# EAGLE board PCB_sterownik_pasek_LED (EAGLE 6.6.0)
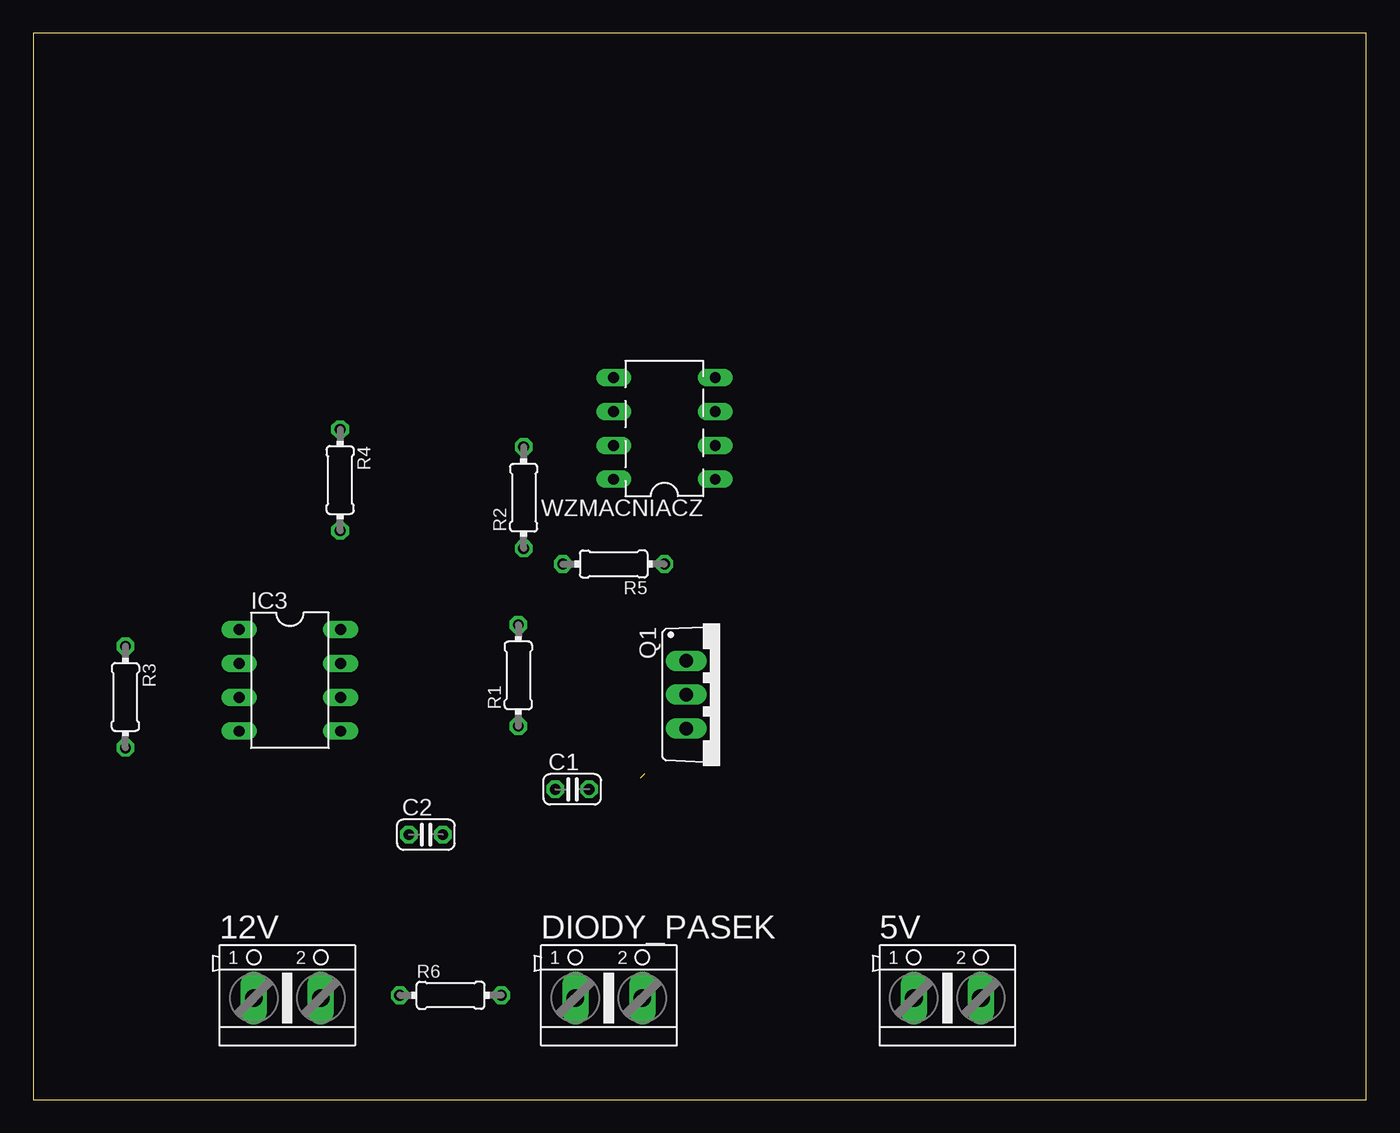
[diagram p0: board, top side]
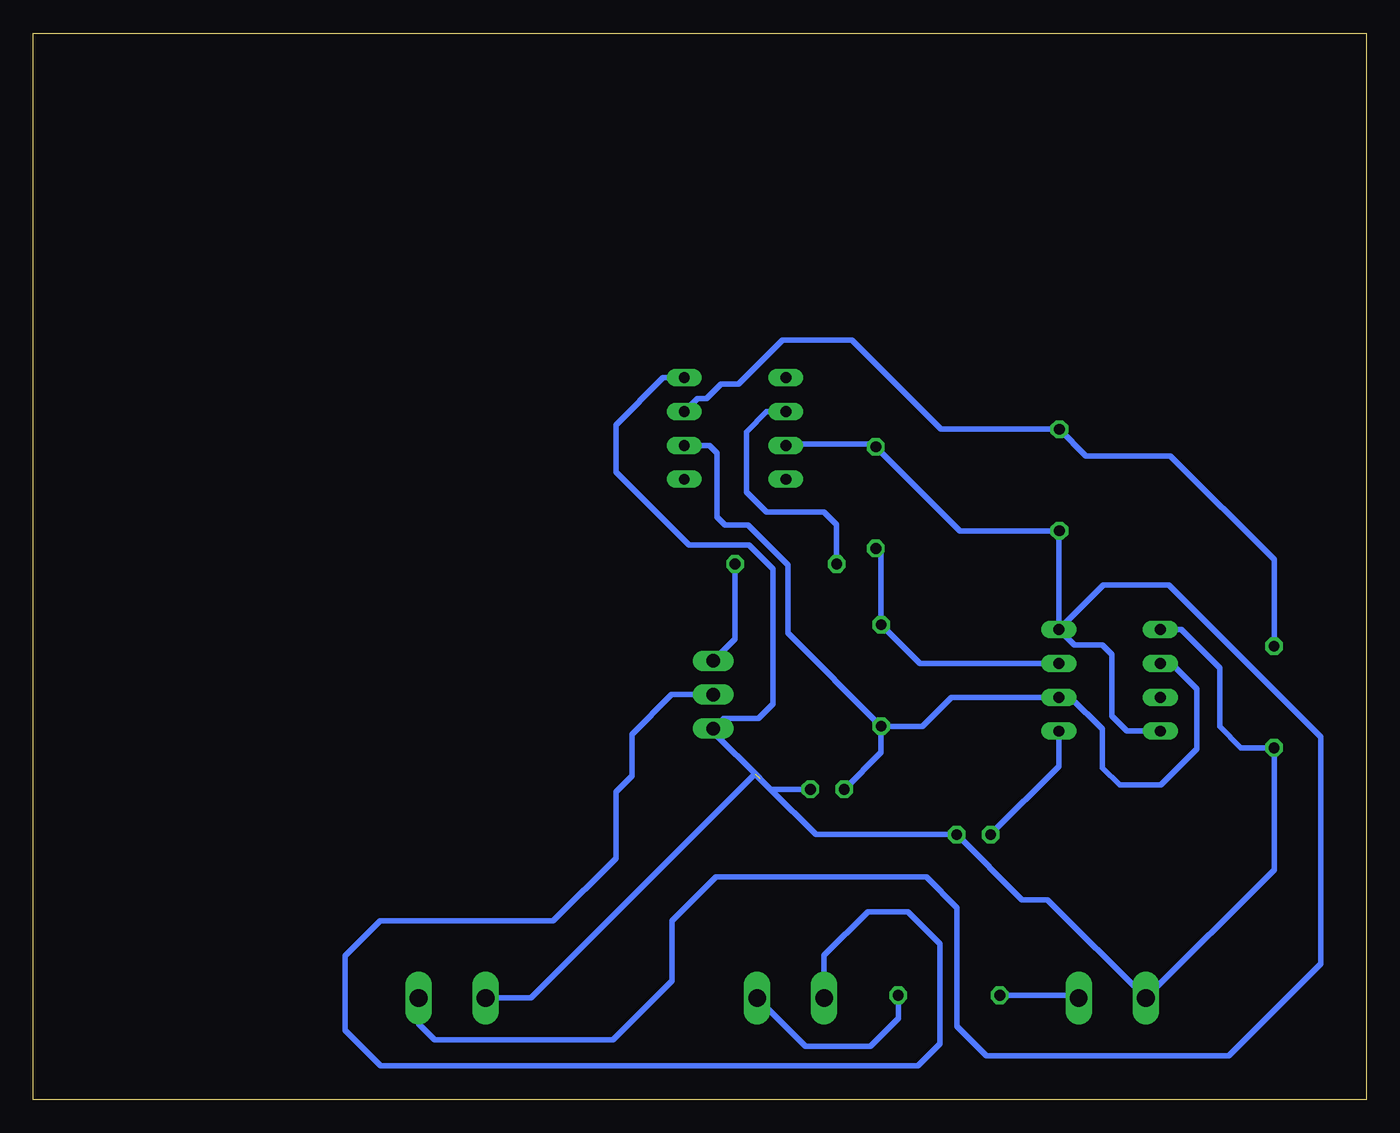
[diagram p1: board, bottom side, seen from below]

Size 100 x 80 mm. Coordinates in mm from the lower left corner, seen from the top.
Outline: 0,0 100,0 100,80 0,80 0,0
Copper layers (1*16): Top 0.035mm / dielectric 1.5mm / Bottom 0.035mm
Design rules "OpenLab (1)": minimum track width 0.4mm, minimum drill 0.6mm, track to track 0.5mm, track to pad 0.5mm, pad to pad 0.5mm, via to via 0.5mm, smd to smd 0.1mm, copper to edge 2mm, drill to drill 0.2mm, minimum pad ring 10mil, minimum via ring 8mil, stop-mask expansion 4mil, vias tented up to drill 0mil, thermal gap 10mil

## Footprints (pad centres in the part's own frame; a part is rotated, then mirrored left to right if it is on the bottom)
AK500/2 = drill 1.321 long: 1 -2.515,0; 2 2.515,0
C025-024X044 = drill 0.813 octagon: 1 -1.27,0; 2 1.27,0
DIL-08 = drill 0.813 long: 1 -3.81,-3.81; 2 -1.27,-3.81; 3 1.27,-3.81; 4 3.81,-3.81; 5 3.81,3.81; 6 1.27,3.81; 7 -1.27,3.81; 8 -3.81,3.81
TO220BV = drill 1.016 long: D 0,-2.54; G -2.54,-2.54; S 2.54,-2.54
0204/7 = drill 0.813 octagon: 1 -3.81,0; 2 3.81,0
DIL08 = drill 0.813 pad 1.27 long: 1 -3.81,-3.81; 2 -1.27,-3.81; 3 1.27,-3.81; 4 3.81,-3.81; 5 3.81,3.81; 6 1.27,3.81; 7 -1.27,3.81; 8 -3.81,3.81

## Placement (x,y rotation side)
5V  [AK500/2]  68.58,7.62 0 top
12V  [AK500/2]  19.05,7.62 0 top
C1  1u  [C025-024X044]  40.43,23.28 0 top
C2  100n  [C025-024X044]  29.45,19.88 0 top
DIODY_PASEK  [AK500/2]  43.18,7.62 0 top
IC3  NE555  [DIL-08]  19.25,31.45 270 top
Q1  IRF740  [TO220BV]  51.53,30.38 270 top
R1  10k  [0204/7]  36.39,31.82 90 top
R2  1k  [0204/7]  36.79,45.16 90 top
R3  [0204/7]  6.91,30.2 270 top
R4  [0204/7]  23.02,46.48 270 top
R5  100  [0204/7]  43.54,40.18 180 top
R6  1k  [0204/7]  31.3,7.82 0 top
WZMACNIACZ  TL081P  [DIL08]  47.35,50.35 90 top

## Library data of the parts
5V 12V DIODY_PASEK = con-ptr500; OC_FARNELL: unknown; OC_NEWARK: unknown
C1 C2 = rcl
IC3 = st-microelectronics; MF: Arrow Electronics; MPN: NE555N; OC_FARNELL: 1467742; OC_NEWARK: 89K1486
Q1 = transistor-power
R1-R6 = eagle-ltspice; SPICEMODEL: NONE; SPICEPREFIX: R
WZMACNIACZ = linear

## Nets
+12V: 12V.2 R6.1
GND: 5V.1 12V.1 C1.2 C2.2 IC3.1 Q1.S R3.2 WZMACNIACZ.4
N$1: R3.1 R4.1 WZMACNIACZ.3
N$2: IC3.7 R1.2 R2.1
N$4: C2.1 IC3.5
N$5: C1.1 IC3.2 IC3.6 R1.1 WZMACNIACZ.2
N$6: R5.2 WZMACNIACZ.6
N$7: Q1.G R5.1
N$8: DIODY_PASEK.2 R6.2
N$9: DIODY_PASEK.1 Q1.D
VCC: 5V.2 IC3.4 IC3.8 R2.2 R4.2 WZMACNIACZ.7

## Tracks (layer width: path | path; a pad name or v marks a point on that pad's centre or on a via)
+12V
  Bottom 0.406: R6.1 21.77,7.82 12V.2
GND  (1 unrouted)
  Bottom 0.406: 5V.1 62.66,7.62 45.84,24.44 44.68,23.28 | 44.68,23.28 41.28,19.88 C2.2 25.84,15 23.91,15 12V.1 6.91,17.25 R3.2 9.39,26.39 11,28 11,32.4 13.86,35.26 IC3.1 | WZMACNIACZ.4 52.74,54.16 56.3,50.6 56.3,47.1 50.8,41.6 46.3,41.6 44.5,39.8 44.5,29.7 45.6,28.6 48.23,28.6 Q1.S 48.99,27.59 45.5,24.1 | C1.2 44.68,23.28
N$1
  Bottom 0.406: R3.1 6.91,40.51 14.7,48.3 21.03,48.3 R4.1 31.89,50.29 38.6,57 43.8,57 47.1,53.7 48.4,53.7 49.5,52.6 50.18,52.6 WZMACNIACZ.3 51.18,51.6
N$2
  Bottom 0.406: IC3.7 33.48,32.72 R1.2 36.39,40.95 R2.1
N$4
  Bottom 0.406: IC3.5 23.06,25 C2.1
N$5
  Bottom 0.406: IC3.2 14.62,32.72 12.7,30.8 12.7,26.3 15.4,23.6 18.5,23.6 19.8,24.9 19.8,27.8 22.18,30.18 IC3.6 31.12,30.18 33.3,28 R1.1 | R1.1 43.4,35.02 43.4,40.1 46.4,43.1 48.1,43.1 48.7,43.7 48.7,48.5 49.28,49.08 WZMACNIACZ.2 | R1.1 36.39,26.05 C1.1
N$6
  Bottom 0.406: R5.2 39.73,43.13 40.7,44.1 45,44.1 46.5,45.6 46.5,50.1 44.98,51.62 WZMACNIACZ.6
N$7
  Bottom 0.406: R5.1 47.35,34.56 Q1.G
N$8
  Bottom 0.406: R6.2 35.11,6.09 37.2,4 42.08,4 DIODY_PASEK.2
N$9
  Bottom 0.406: DIODY_PASEK.1 40.66,10.84 37.4,14.1 34.4,14.1 32,11.7 32,4.2 33.65,2.55 73.95,2.55 76.6,5.2 76.6,10.8 74,13.4 61,13.4 56.3,18.1 56.3,23.07 55.1,24.27 55.1,27.4 52.12,30.38 Q1.D
VCC
  Bottom 0.406: IC3.4 17.94,27.64 19.1,28.8 19.1,33.4 19.8,34.1 21.9,34.1 IC3.8 | IC3.8 23.06,42.63 R4.2 30.49,42.67 R2.2 37.02,49.2 43.42,49.2 WZMACNIACZ.7 | IC3.8 19.72,38.6 14.8,38.6 3.4,27.2 3.4,10.2 10.3,3.3 28.5,3.3 30.7,5.5 30.7,14.4 33,16.7 48.8,16.7 52.1,13.4 52.1,8.9 56.5,4.5 69.9,4.5 71.09,5.7 5V.2